# Altium PCB ServoDrive.PcbDoc
Units mil, origin at the board's own origin, x right, y up, seen from the top; angles counter-clockwise.
Board outline 316.03 x 411.19 mil, 2 copper layers (Top1, Bottom2), stack 14.611 mil thick; 12 components, 15 nets, 59 pads, 22 vias.
Unrouted connection lines stored in the file: 11.
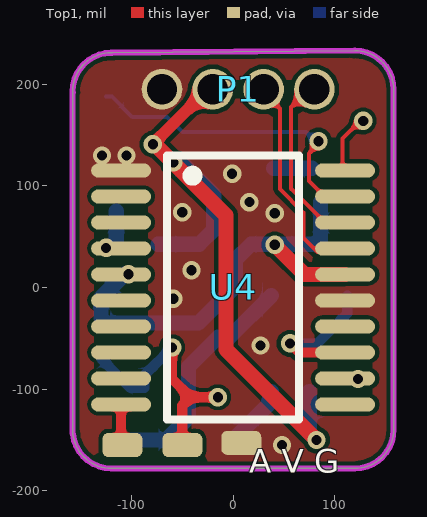
[diagram p0: Top1 view]
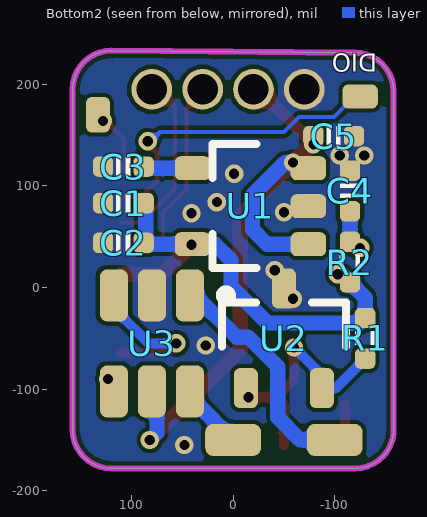
[diagram p1: Bottom2 view, seen from below]
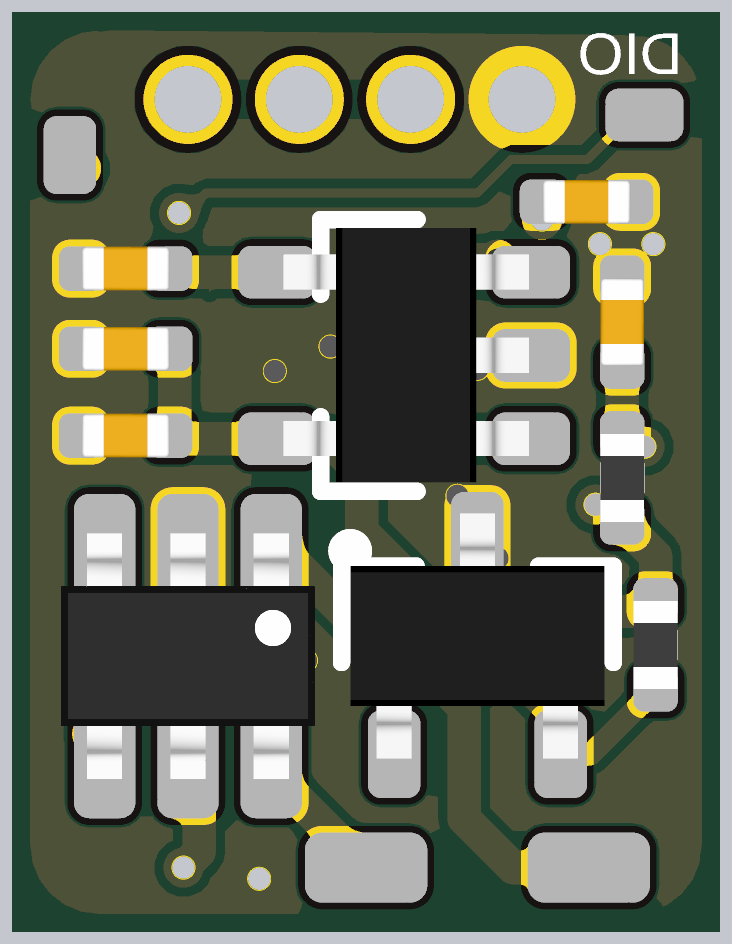
[diagram p2: 3D render of the assembled board from below, using the file's embedded part models]

## Layer stack, top to bottom
Top Solder: solder mask 0.4, Solder Resist, Dk 3.5
Top1: signal copper 1.4
Dielectric 1: prepreg 11.811, PP-006, Dk 4.1
Bottom2: signal copper 1.4
Bottom Solder: solder mask 0.4, Solder Resist, Dk 3.5

## Board outline
-157.79,-144.15 cw(c-155,-143) -158.01,-143 -158.01,191 cw(c-155,191) -157.84,192 cw(c-155,193) -158.01,193 cw(c-120,193) -120,231.02 cw(c-120,228) -119.5,230.97 cw(c-119,228) -119.03,231.01 119.71,233.18 cw(c119.74,230.16) 119.74,233.18 cw(c119.74,194.9) 158.02,194.9 158.02,-140 cw(c120,-140) 120,-178.01 -120,-178.01 cw(c-120,-140)

## Design rules (kind name [scope] priority, off if disabled: settings)
Clearance Clearance_Logo [InNetClass('Logo')] p1: gap=8 ignorepadtopadclearanceinfootprint=FALSE
Clearance [All] p2: gap=4 ignorepadtopadclearanceinfootprint=FALSE except(0: Arc-Hole Track-Hole SMDPad-Hole THPad-Hole Via-Hole Fill-Hole Poly-Hole Region-Hole Text-Hole)
ComponentClearance [All] p1: gap=0 collisioncheckmode=3 verticalgap=0 showdistances=FALSE
DiffPairsRouting [All] p1: maxlimit=9 minlimit=9 mostfreqgap=9 toplayer_minwidth=15 toplayer_maxwidth=15 toplayer_prefwidth=15 bottomlayer_minwidth=15 bottomlayer_maxwidth=15 bottomlayer_prefwidth=15 maxuncoupledlength=500
FanoutControl Fanout_BGA [All] p1: bgadir=Out bgaviamode=Centered fanoutstyle=Auto fanoutdirection=Alternating viagrid=1 // Fanout_BGA (Default Rule)
HoleSize [All] p1: absolutevalues=TRUE maxlimit=10000 minlimit=8 maxpercent=80.000 minpercent=20.000
MinimumSolderMaskSliver [All] p1 off: minsoldermaskwidth=2
PlaneClearance [All] p1: clearance=8
PlaneConnect [All] p1: planeconnectstyle=Direct reliefexpansion=20 reliefentries=4 reliefconductorwidth=10 reliefairgap=10
PolygonConnect [All] p1: connectstyle=Direct reliefconductorwidth=10 reliefentries=4 polygonreliefangle="90 Angle" airgapwidth=10
RoutingVias [All] p1: holewidth=8 width=16 viastyle="Through Hole" minholewidth=6 minwidth=12 maxholewidth=28 maxwidth=50
SilkToSilkClearance [All] p1: silktosilkclearance=0
SilkToSolderMaskClearance [IsPad] p1: minsilkscreentomaskgap=0 clearancetoexposedcopper=TRUE
SolderMaskExpansion [All] p1: expansion=3 istentingtop=FALSE
Width Logo [InNetClass('Logo')] p1: maxlimit=100 minlimit=0.1 preferedwidth=10
Width GND [(InNet('AGND') OR InNet('GND'))] p2: maxlimit=50 minlimit=4 preferedwidth=10
Width VCC [(InNet('VDD_SYS_3.3V') OR InNet('VDD_AV_3.3V') OR InNet('VDD_5V') OR InNet('VDD1V2-SYS') OR InNet('VDD1V1-EPHY') OR InNet('VDD-CPUX') OR InNet('VDD-CPUS') OR InNet('VDD-CPUFB') OR InNet('VCC-DRAM'))] p3: maxlimit=50 minlimit=4 preferedwidth=10
Width [All] p4: maxlimit=10000 minlimit=4 preferedwidth=4
21 further rules are at their usual default settings.

## Components (designator, comment, footprint, x,y, rotation, side; value= is the part's Value field where it differs from the comment)
C1 "10uF" CAP_0402 108,83 r180 bottom value=0.1u
C2 "0.1uF" CAP_0402 108,44 r180 bottom value=0.1u
C3 "10nF" CAP_0402 108,119 r0 bottom value=0.1u
C4 "0.1uF" CAP_0402 -115,95 r270 bottom value=0.1u
C5 "10uF" CAP_0402 -99,149 r0 bottom value=0.1u
P1 "HDR1x4_1.27" HDR1X4_1.27_180 -70,195 r90 top
R1 "120R" RES_0402 -130,-50 r270 bottom value=22R
R2 "10K" RES_0402 -115,25 r90 bottom value=22R
U1 "LP2992" SOT23-5 -15,80 r0 bottom locked
U2 "TL431IDBZT" SOT23-3 -50,-50 r90 bottom
U3 "FM116B" SOT23-6 80,-55 r270 bottom
U4 "STM32F030F6/STM32F042F6" TSSOP-20 0,0 r0 top locked

## Footprints (in the part's own frame and the unit in brackets; to place one, negate y for a bottom-side part, rotate by r counter-clockwise, add the part's x,y. Pads: shape width x height; smd on the part's side, far side on the other; paste and mask are expansions set on the pad)
CAP_0402 [mil] "Chip Inductor, Body 0.6x0.3mm, IPC High Density"
  rrect50% 20x20 smd: 1(-20,0) 2(20,0)
  silkscreen extent -7,-9 7,9, body extent -20,-10 20,10, height 20
HDR1X4_1.27_180 [mil]
  round 40 hole 30 mask+4: 1(0,0) 2(0,-50) 3(0,-100) 4(0,-150)
RES_0402 [mil] "Chip Inductor, Body 0.6x0.3mm, IPC High Density"
  rrect50% 20x20 smd: 1(-20,0) 2(20,0)
  silkscreen extent -7,-10 7,10, body extent -20,-10 20,10, height 14
SOT23-3 [mm] "SOT23, 3-Leads, Body 3.1x3.0mm (max), Pitch 0.95mm, IPC Medium Density"
  rrect50% 1x0.6 smd: 1(-1.246,0.95) 2(-1.246,-0.95) 3(1.246,0)
  silkscreen extent -0.2,-1.55 0.9,1.55, body extent -1.3,-1.45 1.5,1.45, height 1.2
SOT23-5 [mm] "SOT23, 3-Leads, Body 3.1x3.0mm (max), Pitch 0.95mm, IPC Medium Density"
  rrect50% 0.889x0.6 smd: 1(-1.5,0.95) 2(-1.5,0) 3(-1.5,-0.95) 4(1.396,-0.95) 5(1.396,0.95)
  silkscreen extent -0.2,-1.55 0.9,1.55, body extent -1.48,-1.45 1.32,1.45, height 1.2
SOT23-6 [mm]
  rrect50% 1.3x0.7 smd: 1(-1.2,0.95) 2(-1.2,0) 3(-1.2,-0.95) 4(1.2,-0.95) 5(1.2,0) 6(1.2,0.95)
  silkscreen extent -1.32,1.73 -1.08,1.97, body extent -1.4,-1.45 1.4,1.45, height 1.45
TSSOP-20 [mm] "SOP, 20-Leads, Body 6.6x4.5mm, Pitch 0.65mm, IPC High Density"
  oval 1.5x0.35 smd: 1(-2.8,2.925) 2(-2.8,2.275) 3(-2.8,1.625) 4(-2.8,0.975) 5(-2.8,0.325) 6(-2.8,-0.325) 7(-2.8,-0.975) 8(-2.8,-1.625) 9(-2.8,-2.275) 10(-2.8,-2.925) 11(2.8,-2.925) 12(2.8,-2.275) 13(2.8,-1.625) 14(2.8,-0.975) 15(2.8,-0.325) 16(2.8,0.325) 17(2.8,0.975) 18(2.8,1.625) 19(2.8,2.275) 20(2.8,2.925)
  silkscreen extent -1.65,-3.3 1.65,3.3, body extent -3.27,-3.3 3.27,3.3, height 1.2

## Part data
C1 C2 C3 C4 C5: library part 电容-0402, "Capacitor"
P1: "Header", Add into BOM=yes, Convert to PCB=yes, Device=HDR1x4_1.27, Name=HDR1x4_1.27, Origin Footprint 1=HDR1X4_1.27_180, Origin Footprint 2=HDR1X4_1.27_180F, Origin Footprint 3=HDR1X4_1.27_180H, Origin Footprint 4=HDR1X4_1.27_180HF, Symbol=HDR1x4_1.27
R1 R2: library part 电阻-0402, "Resistor"
U1: "LDO"
U2: "Adjustable precision shunt regulator 3-SOT-23 -40 to 85", Package="SOT-23-3 Texas Instruments", Availability=Warning, Check_prices=https://www.snapeda.com/parts/TL431IDBZT/Texas%20Instruments/view-part/1206577/?ref=eda, MF="Texas Instruments", MP=TL431IDBZT, Price=None, Purchase-URL=https://pricing.snapeda.com/search/part/TL431IDBZT/?ref=eda, SnapEDA_Link=https://www.snapeda.com/parts/TL431IDBZT/Texas%20Instruments/view-part/1206577/?ref=snap
U3: PartNumber=24LC256-I/ST, Code_JEDEC=MO-153, DatasheetVersion="revP, Oct-2007", PackageDescription="8-Lead Plastic Thin Shrink Small Outline (ST) - 4.4mm Body [TSSOP]", PackageReference=TSSOP-ST8, PackageVersion="revBB, Aug-2009"
U4: library part STM32F030F4P6, "ARM Cortex-M0 32-bit MCU, 16 KB Flash, 4 KB Internal RAM, 15 I/Os, 20-pin TSSOP, -40 to 85 degC, Tube", I/Os (High Current)=15, Operating Frequency(F) (Processor speed) (MHz)=48, Supplier Part Number 1=497-14044-5-ND, Supply Voltage(Vcc) min (V)=2.4, ComponentLink1Description="Manufacturer URL", ComponentLink1URL=http://www.st.com/web/en/home.html, ComponentLink2Description=Datasheet, ComponentLink2URL=http://www.st.com/st-web-ui/static/active/en/resource/technical/document/datasheet/DM00088500.pdf, ComponentLink3Description="Package Specification", ComponentLink3URL=http://www.st.com/st-web-ui/static/active/en/resource/technical/document/datasheet/DM00065136.pdf, Core="ARM Cortex-M0", DatasheetVersion="Rev. 1", FLASH Size (Prog) (kB)=16, Internal RAM Size (kB)=4, Mounting Technology="Surface Mount", PackageDescription="20-Pin Thin Shrink Small Outline Package, 6.5 x 4.4 mm Body, 0.65 mm Pitch", PackageReference=TSSOP20, PackageVersion="Rev. 1, 11/2012", Packing=Tube, PartNumber=STM32F030F4P6, Supplier 1=Digi-Key, Supplier 2=Newark, Supplier 3=Mouser, Supplier Part Number 2=06X3648, Supplier Part Number 3=511-STM32F030F4P6

## Free pads (board coordinates)
  rrect50% 35x23.62 smd far side: 1(-125,188)
  rrect50% 23.62x35 smd far side: 1(133,170)
  rrect50% 39.37x23.62 smd: ""(-109.06,-155) ""(-50,-155) ""(8,-153)
  rrect50% 55x31.5 smd far side: ""(-100,-150) ""(0,-150)

## Via types
v1: diameter 18, hole 10, Top1 to Bottom2, tented both sides, 22 vias

## Nets (pads, with @x,y where several pads share a name; then routed paths per layer and width w, separated by ;. In a path a pad name is that pad's centre, name@x,y a point inside that pad or via, vN(x,y) a via of type N, cw(c..) or ccw(c..) an arc to the next point about the centre after c; other vN are vias at no path point)
ADC_1: pad.@-109.06,-155 U4.10 | length 38.7
  Top1 w10: pad.@-110.24,-153.82 U4.10
GND: C1.1 C2.1 C3.2 C4.1 C5.1 P1.1 pad.@8,-153 U1.2 U2.3 U3.2 U4.1 U4.15
  other v1: 48,-155 27,-57 -59,-11 -41,17 41,73 -50,74 16,84 -1,112 -129,130 -105,130
NetC3_1: C3.1 U1.4 | length 37.7
  Bottom2 w15: U1.4 77.6,117.4
NetC4_2: C4.2 R2.2 U4.4 | length 30
  Bottom2 w15: R2.2 C4.2
  other v1: -125,39
OUT1_1: pad.@0,-150 U3.6 | length 63.3
  Bottom2 w15: pad.@0,-150 37.6,-112.4 U3.6@37.6,-102.24
OUT2_1: pad.@-100,-150 U3.1 | length 225.8
  Bottom2 w15: pad.@-100,-150 -66,-150 -44,-128 -44,-78 -15,-49 -3.65,-49 U3.1@37.6,-7.76
PWM1_1: U3.4 U4.12
  other v1: 123,-90
PWM2_1: U3.3 U4.13 | length 144.4
  Top1 w10: v1(56,-55) 64.98,-63.98 U4.13
  Bottom2 w10: v1(56,-55) 83,-55 112.4,-25.6 U3.3@112.4,-7.76
SCL_1: P1.3 U4.17 | length 216.4
  Top1 w4: P1.3@23.74,198.26 46,176 46,96.91 69,73.91 69,49 83,35 106.85,35 U4.17
SDA_1: P1.4 U4.18 | length 177.5
  Top1 w4: P1.4 74.52,195 57,177.48 57,97.22 90.24,63.98 U4.18
SWCLK_1: pad.1@133,170 U4.20 | length 60
  Top1 w4: U4.20 107.73,117.66 107.73,146.73 125,164 v1(128,164)
SWDIO_1: pad.1@-125,188 U4.19 | length 312
  Top1 w4: v1(84,144) 84,141.37 74.71,132.08 74.71,105.01 90.15,89.57 U4.19
  Bottom2 w4: pad.1@-125,188 -119.31,188 -99.31,168 -65,168 -50,153 71.79,153 80.79,144 v1(84,144)
VCC_3V3: C1.2 C2.2 R1.1 R2.1 U1.5 U4.5 U4.16 | length 444.9
  Top1 w15: v1(41,42) 70.2,12.8 U4.16
  Bottom2 w15: v1(-103,13) -107,13 R2.1 -130,-10 R1.1 -125,-35 -34,-35 2,1 2,27 17.6,42.6 41,42.6 86,42.6 C1.2@86,84.2
VCC_5V: C5.2 P1.2 U1.1 U1.3 U3.5 | length 643.1
  Top1 w12: v1(-79,141) P1.2@-19,201
  Top1 w15: v1@-78.74,142.74 -73,137 v1(-59,123) -7,71 -7,-61 v1(82,-150)
  Bottom2 w15: U1.1 -33.4,42.6 -19,57 -19,91 -51,123 v1(-59,123) ; U3.5@75,-102.24 75,-143 v1(82,-150)
VREF: pad.@-50,-155 R1.2 U2.1 U2.2 | length 239.8
  Top1 w10: v1(-60,-59) -60,-90 -42,-108 ; pad.@-50,-155 -50,-116 -42,-108 ; v1(-15,-108) -42,-108
  Bottom2 w10: R1.2 -100.94,-99.06 U2.2 -87.4,-86.4 v1(-60,-59)
pads on no net: U4.2 U4.3 U4.6 U4.7 U4.8 U4.9 U4.11 U4.14

## Polygon pours and split planes (outlines as drawn)
GND on Top1 "GND_L01_P000" (solid, remove dead copper, pour order 0): -155,428 160,428 160,-200 -160,-200
GND on Bottom2 "GND_L02_P001" (solid, remove dead copper, pour order 1): -155,411 160,411 160,-200 -160,-200

## Keep-outs
Keep-Out Layer:
  lines w6: 119.74,233.18 cw(c119.74,194.9) 158.02,194.9 158.02,-140 cw(c120,-140) 120,-178.01 -120,-178.01 cw(c-120,-140) -157.79,-144.15 cw(c-155,-143) -158.02,-143 -158.01,191 cw(c-155,191) -157.84,192 cw(c-155,193) -158.02,193 cw(c-120,193) -120,231.02 cw(c-120,228) -119.5,230.97 cw(c-119,228) -119.03,231.01 119.71,233.18 ; 119.74,233.18 ccw(c119.74,230.16) 119.71,233.18

## Silkscreen, mask and mechanical layers (free items; w line width, h text height)
Top Overlay:
  text "A V G" at 15.79,-190.33 h40
Bottom Overlay:
  text "DIO" at -142,206.33 h30
Mechanical 1:
  lines w6: 119.74,233.18 cw(c119.74,194.9) 158.02,194.9 158.02,-140 cw(c120,-140) 120,-178.01 -120,-178.01 cw(c-120,-140) -157.79,-144.15 cw(c-155,-143) -158.02,-143 -158.01,191 cw(c-155,191) -157.84,192 cw(c-155,193) -158.02,193 cw(c-120,193) -120,231.02 cw(c-120,228) -119.5,230.97 cw(c-119,228) -119.03,231.01 119.71,233.18 ; 119.74,233.18 ccw(c119.74,230.16) 119.71,233.18